# EAGLE board PCB (EAGLE 9.7.0)
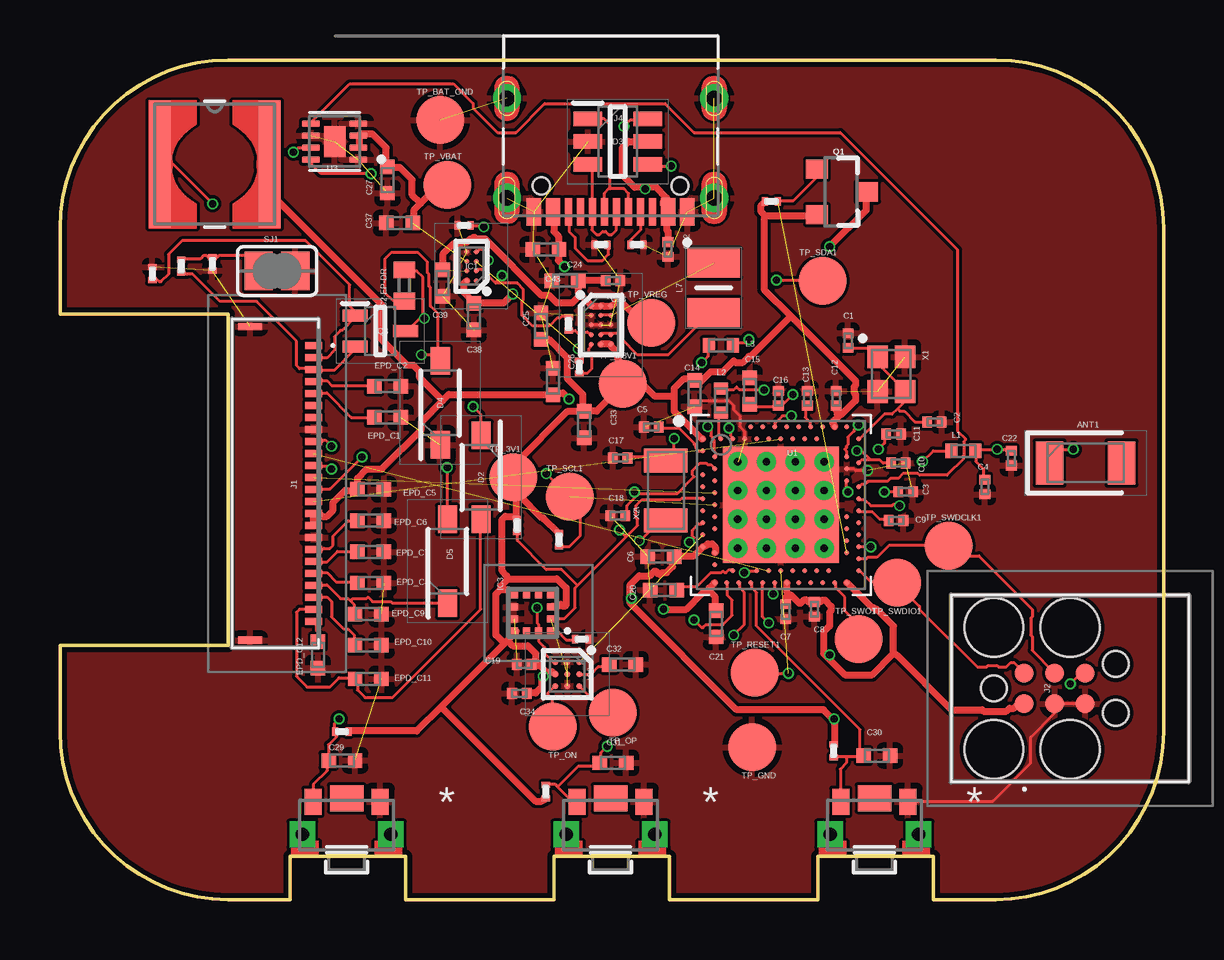
[diagram p0: board, top side]
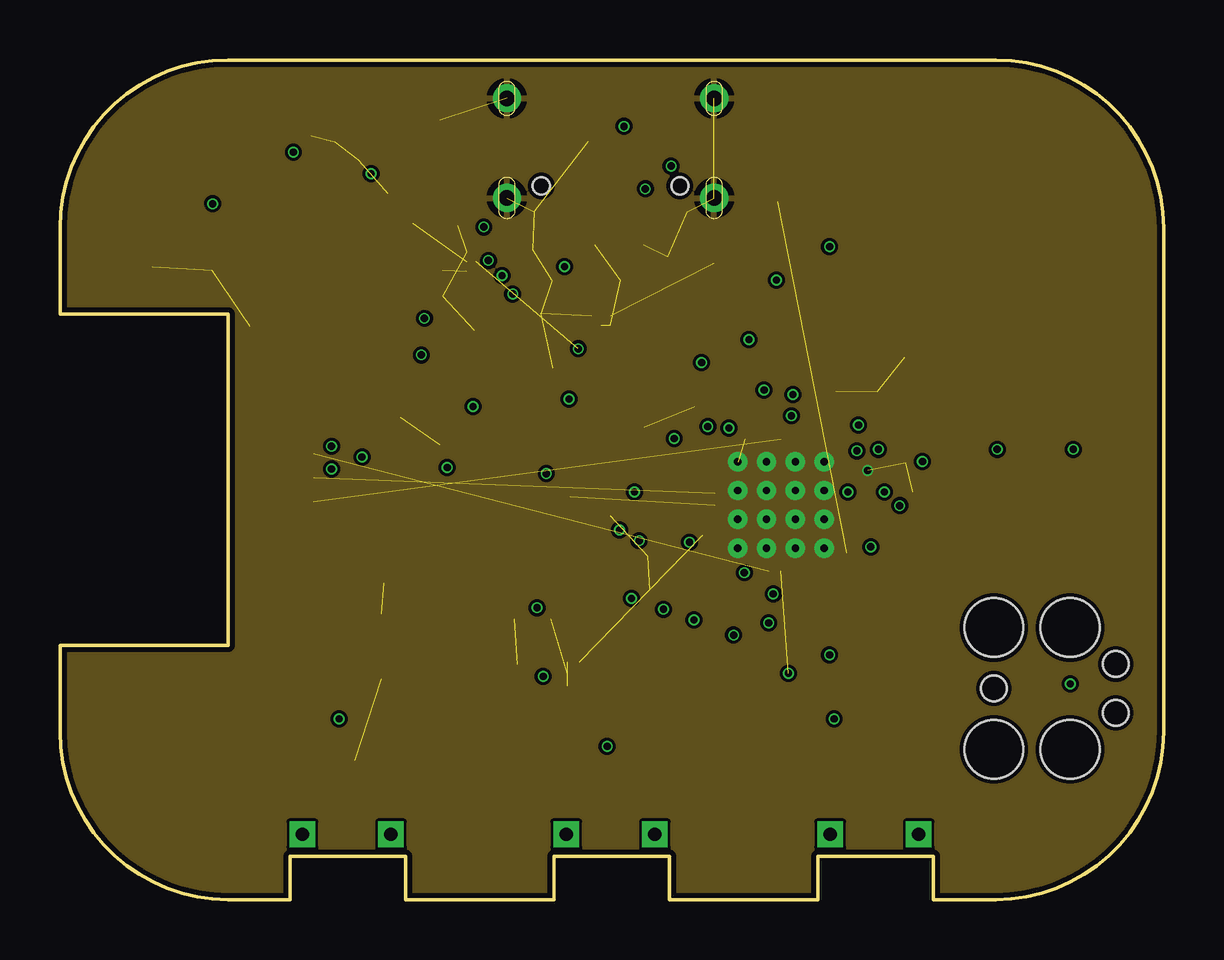
[diagram p1: board, inner layer Route2]
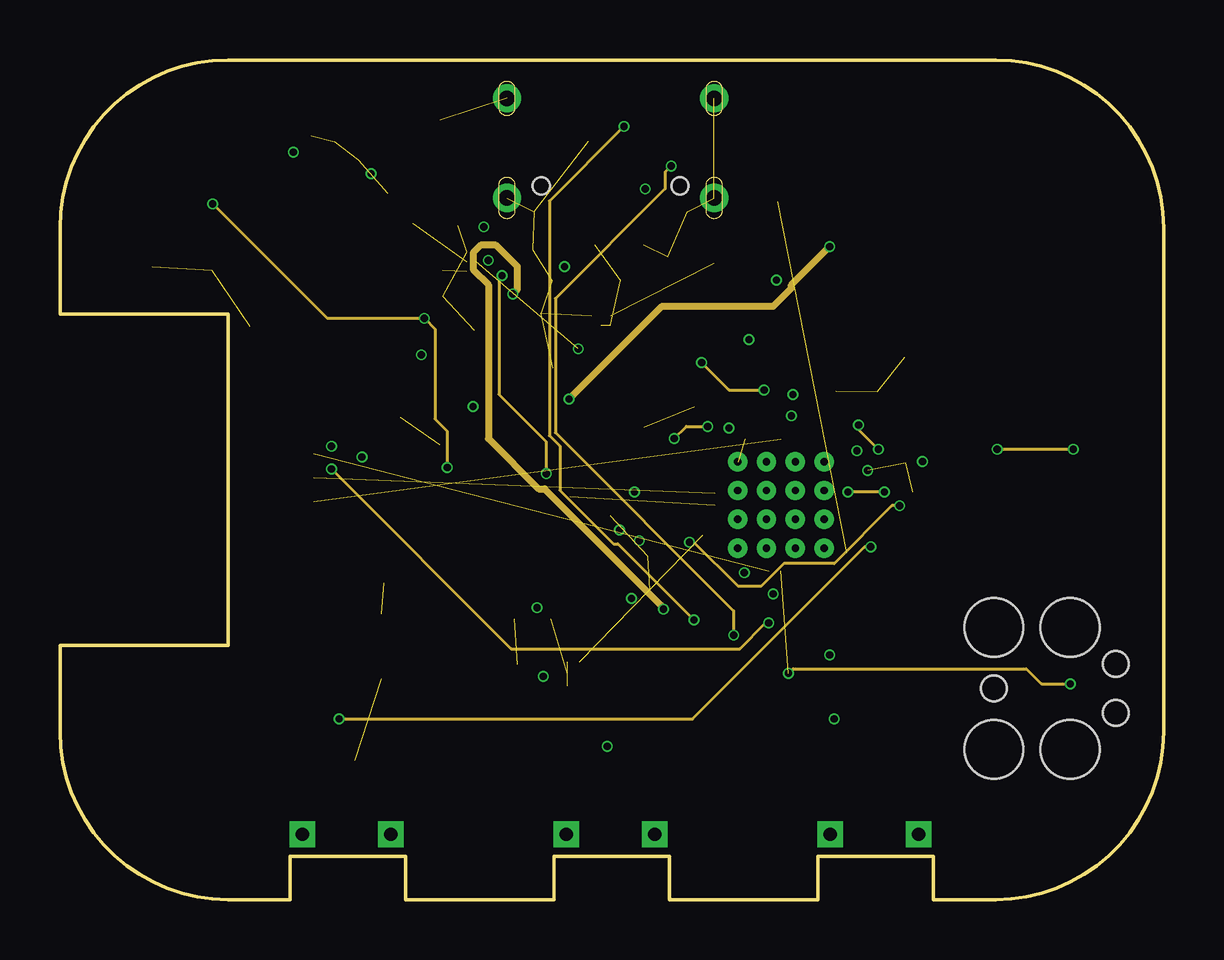
[diagram p2: board, inner layer Route15]
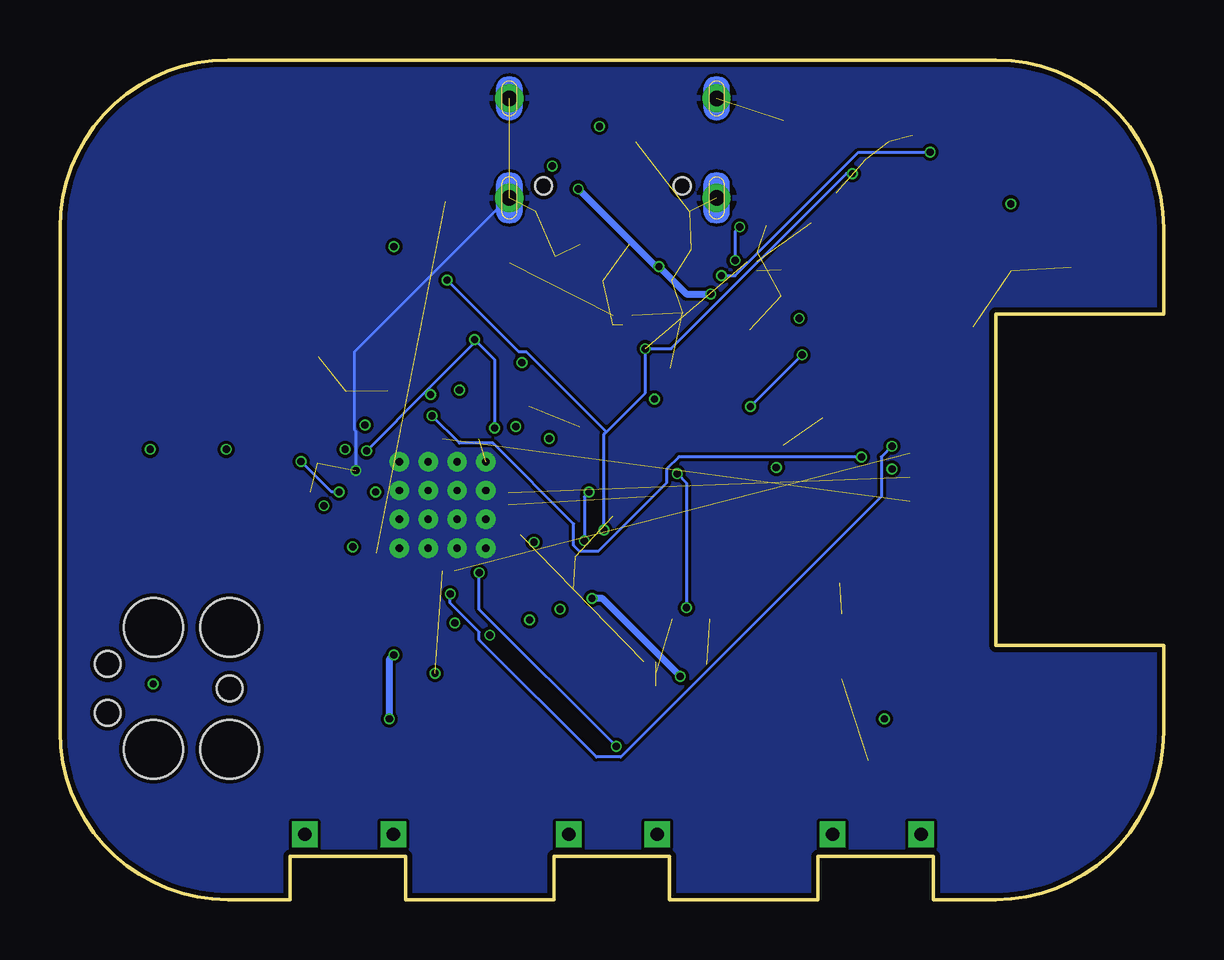
[diagram p3: board, bottom side, seen from below]

Size 46 x 35 mm. Coordinates in mm from the lower left corner, seen from the top.
Outline: 39,0 36.4,0 36.4,1.8 31.6,1.8 31.6,0 25.4,0 25.4,1.8 20.6,1.8 20.6,0 14.4,0 14.4,1.8 9.6,1.8 9.6,0 7,0 arc-90 0,7 0,10.6 7,10.6 7,24.4 0,24.4 0,28 arc-90 7,35 39,35 arc-90 46,28 46,7 arc-90 39,0
Copper layers (1*16): Top 0.035mm / dielectric 1.6mm / Bottom 0.035mm
Design rules "jlcpcb-2layers.dru": minimum track width 5mil, minimum drill 0.3mm, track to track 5mil, track to pad 5mil, pad to pad 5mil, via to via 5mil, smd to smd 5mil, copper to edge 0.2mm, drill to drill 6mil, minimum pad ring 10mil, minimum via ring 3mil, stop-mask expansion 4mil, vias tented up to drill 0mil, thermal gap 10mil

## Footprints (pad centres in the part's own frame; a part is rotated, then mirrored left to right if it is on the bottom)
2450AT18B100E_ANTC3216X140N = smd 1.15 x 1.8: 1 -1.5,0; 2 1.5,0
NORDIC_NRF_3_RESC0201_N = smd 0.4 x 0.45: 1 -0.305,0; 2 0.305,0
ESP32_C6_LIBRARY_1_ESP32_WROVER_EAGLE-LTSPICE_C0402 = smd 0.7 x 0.9: 1 -0.65,0; 2 0.65,0
NORDIC_NRF_3_RESC0402_N = smd 0.6 x 0.6: 1 -0.55,0; 2 0.55,0
ESP32_C6_LIBRARY_5_SOD3716X135N = smd 1.15 x 0.8: 1 -1.75,0; 2 1.75,0
ESP32_C6_LIBRARY_3_SOT95P280X145-6N = smd 1.2 x 0.6: 1 -1.25,0.95; 2 -1.25,0; 3 -1.25,-0.95; 4 1.25,-0.95; 5 1.25,0; 6 1.25,0.95
BQ25180YBGR_BGA8C40P2X4_100X155X50 = smd 0.2 x 0.2: A1 -0.2,0.6; A2 0.2,0.6; B1 -0.2,0.2; B2 0.2,0.2; C1 -0.2,-0.2; C2 0.2,-0.2; D1 -0.2,-0.6; D2 0.2,-0.6
DRV2605YZFR_BGA9C50P3X3_144X144X62 = smd 0.25 x 0.25: A1 -0.5,0.5; A2 0,0.5; A3 0.5,0.5; B1 -0.5,0; B2 0,0; B3 0.5,0; C1 -0.5,-0.5; C2 0,-0.5; C3 0.5,-0.5
BMA423_BMA423 = smd 0.3 x 0.35: 1 -0.75,-0.775; 2 -0.25,-0.775; 3 0.25,-0.775; 4 0.75,-0.775; 7 0.75,0.775; 8 0.25,0.775; 9 -0.25,0.775; 10 -0.75,0.775 | smd 0.35 x 0.3: 5 0.775,-0.25; 6 0.775,0.25; 11 -0.775,0.25; 12 -0.775,-0.25
RT6160AWSC_BGA15C40P3X5_140X230X60 = smd 0.216 x 0.216: A1 -0.4,0.8; A2 0,0.8; A3 0.4,0.8; B1 -0.4,0.4; B2 0,0.4; B3 0.4,0.4; C1 -0.4,0; C2 0,0; C3 0.4,0; D1 -0.4,-0.4; D2 0,-0.4; D3 0.4,-0.4; E1 -0.4,-0.8; E2 0,-0.8; E3 0.4,-0.8
503480-2400_5034802400 = smd 0.3 x 0.7: 1 -5.75,1.525; 2 -5.25,1.525; 3 -4.75,1.525; 4 -4.25,1.525; 5 -3.75,1.525; 6 -3.25,1.525; 7 -2.75,1.525; 8 -2.25,1.525; 9 -1.75,1.525; 10 -1.25,1.525; 11 -0.75,1.525; 12 -0.25,1.525; 13 0.25,1.525; 14 0.75,1.525; 15 1.25,1.525; 16 1.75,1.525; 17 2.25,1.525; 18 2.75,1.525; 19 3.25,1.525; 20 3.75,1.525; 21 4.25,1.525; 22 4.75,1.525; 23 5.25,1.525; 24 5.75,1.525 | smd 0.3 x 1: MP1 -6.54,-1.125; MP2 6.54,-1.125
TC2030-IDC_TC2030IDC = smd 0.783 x 0.783: 1 -0.953,-0.635; 2 -0.953,0.635; 3 0.317,-0.635; 4 0.317,0.635; 5 1.588,-0.635; 6 1.588,0.635 | hole 2.451: -2.223,-2.54; -2.223,2.54; 0.952,-2.54; 0.952,2.54 | hole 1.067: -2.223,0; 2.857,-1.016; 2.857,1.016
KH-TYPE-C-16P_KINGHELM_KH-TYPE-C-16P = smd 0.6 x 1.15: A1_B12 -3.2,4.725; A4_B9 -2.4,4.725; A9_B4 2.4,4.725; A12_B1 3.2,4.725 | smd 0.3 x 1.15: A5 -1.25,4.725; A6 -0.25,4.725; A7 0.25,4.725; A8 1.25,4.725; B5 1.75,4.725; B6 0.75,4.725; B7 -0.75,4.725; B8 -1.75,4.725 | drill 0.65 pad 1.05: SH1 -4.32,0; SH2 4.32,0; SH3 -4.32,4.15; SH4 4.32,4.15 | hole 0.7: -2.89,3.65; 2.89,3.65
NORDIC_NRF_2_RESC0402_L = smd 0.5 x 0.6: 1 -0.5,0; 2 0.5,0
ESP32_C6_LIBRARY_2_IND_4828-WE-TPC_WRE = smd 0.9 x 5.3: 1 -2.286,0; 2 2.286,0
MLP2016SR47MT0S1_INDC2016X100N = smd 1.2 x 2.2: 1 -1.028,0; 2 1.028,0
ESP32_C6_LIBRARY_4_ESP32_C6_LIBRARY_4_ESP32_C6_LIBRARY_4_ESP32_C6_LIBRARY_4_ESP32_WROVER_SPARKFUN-DISCRETESEMI_SOT23-3 = smd 0.8 x 0.9: 1 -0.95,-1; 2 0.95,-1; 3 0,1.1
ESP32_C6_LIBRARY_6_SOT65P210X110-3N = smd 1.05 x 0.5: 1 -1.05,0.65; 2 -1.05,-0.65; 3 1.05,0
CPF0201D7K68C1_0201 = smd 0.35 x 0.25: 1 0,0.275; 2 0,-0.275
ESP32_C6_LIBRARY_7_JUMPER_SJ = smd 1.168 x 1.6: 1 -0.762,0; 2 0.762,0
2025-10-22_07-23-44_LIBRARY_SW_EVP-AKE31A_PAN = smd 0.711 x 1.092: 1 -1.4,-0.972; 2 1.4,-0.972 | drill 0.559 pad 0.914 square: 3 -1.848,0.381; 4 1.848,0.381 | smd 1.397 x 1.092: 5 0,-1.124
HECTOR_WATCH_1_TP20R = smd 2 x 2: TP 0,0
NORDIC_NRF_4_AQFN50P700X700X85_HS-74N = smd 4.85 x 4.85: P$74 0,0 | drill 0.3 pad 0.6: P$75 -1.8,1.8; P$76 -0.6,1.8; P$77 0.6,1.8; P$78 1.8,1.8; P$79 -1.8,0.6; P$80 -0.6,0.6; P$81 0.6,0.6; P$82 1.8,0.6; P$83 -1.8,-0.6; P$84 -0.6,-0.6; P$85 0.6,-0.6; P$86 1.8,-0.6; P$87 -1.8,-1.8; P$88 -0.6,-1.8; P$89 0.6,-1.8; P$90 1.8,-1.8 | smd 0.2 x 0.2: P$A8 -1.25,3.25; P$A10 -0.75,3.25; P$A12 -0.25,3.25; P$A14 0.25,3.25; P$A16 0.75,3.25; P$A18 1.25,3.25; P$A20 1.75,3.25; P$A22 2.25,3.25; P$A23 2.75,3.25; P$AA24 3.25,-2.25; P$AB2 -2.75,-2.5; P$AC5 -2,-2.75; P$AC9 -1,-2.75; P$AC11 -0.5,-2.75; P$AC13 0,-2.75; P$AC15 0.5,-2.75; P$AC17 1,-2.75; P$AC19 1.5,-2.75; P$AC21 2,-2.75; P$AC24 3.25,-2.75; P$AD2 -2.75,-3.25; P$AD4 -2.25,-3.25; P$AD6 -1.75,-3.25; P$AD8 -1.25,-3.25; P$AD10 -0.75,-3.25; P$AD12 -0.25,-3.25; P$AD14 0.25,-3.25; P$AD16 0.75,-3.25; P$AD18 1.25,-3.25; P$AD20 1.75,-3.25; P$AD22 2.25,-3.25; P$AD23 2.75,-3.25; P$B1 -3.25,2.75; P$B3 -2.5,2.75; P$B5 -2,2.75; P$B7 -1.5,2.75; P$B9 -1,2.75; P$B11 -0.5,2.75; P$B13 0,2.75; P$B15 0.5,2.75; P$B17 1,2.75; P$B19 1.5,2.75; P$B24 3.25,2.75; P$C1 -3.25,2.25; P$D2 -2.75,2; P$D23 2.75,2; P$E24 3.25,1.75; P$F2 -2.75,1.5; P$F23 2.75,1.5; P$G1 -3.25,1.25; P$H2 -2.75,1; P$H23 2.75,1; P$J1 -3.25,0.75; P$J24 3.25,0.75; P$K2 -2.75,0.5; P$L1 -3.25,0.25; P$L24 3.25,0.25; P$M2 -2.75,0; P$N1 -3.25,-0.25; P$N24 3.25,-0.25; P$P2 -2.75,-0.5; P$P23 2.75,-0.5; P$R1 -3.25,-0.75; P$R24 3.25,-0.75; P$T2 -2.75,-1; P$T23 2.75,-1; P$U1 -3.25,-1.25; P$U24 3.25,-1.25; P$V23 2.75,-1.5; P$W1 -3.25,-1.75; P$W24 3.25,-1.75; P$Y2 -2.75,-2; P$Y23 2.75,-2
ESP32_C6_LIBRARY_SON50P200X200X80-9N = smd 0.76 x 0.27: 1 -0.985,0.75; 2 -0.985,0.25; 3 -0.985,-0.25; 4 -0.985,-0.75; 5 0.985,-0.75; 6 0.985,-0.25; 7 0.985,0.25; 8 0.985,0.75 | smd 0.9 x 1.3: 9 0,0
NORDIC_NRF_BT-XTAL_2016_N = smd 0.95 x 0.85: 1 -0.725,-0.575; 2 0.725,-0.575; 3 0.725,0.575; 4 -0.725,0.575
NORDIC_NRF_1_XTAL_3215_N = smd 1 x 1.8: 1 -1.25,0; 2 1.25,0

## Placement (x,y rotation side)
ANT1  2450AT18B100E  [2450AT18B100E_ANTC3216X140N]  42.75,18.2 0 top
C1  12pF  [NORDIC_NRF_3_RESC0201_N]  32.85,23.3 90 top
C2  12pF  [NORDIC_NRF_3_RESC0201_N]  36.45,19.9 0 top
C2-EP-DR  4.7uF/25V  [ESP32_C6_LIBRARY_1_ESP32_WROVER_EAGLE-LTSPICE_C0402]  14.35,25.6 90 top
C3  1pF  [NORDIC_NRF_3_RESC0201_N]  35.25,17 180 top
C4  1pF  [NORDIC_NRF_3_RESC0201_N]  38.55,17.2 90 top
C5  100nF  [NORDIC_NRF_3_RESC0201_N]  24.65,19.7 180 top
C6  1uF  [NORDIC_NRF_3_RESC0402_N]  25.05,14.3 180 top
C7  100nF  [NORDIC_NRF_3_RESC0201_N]  30.25,12 270 top
C8  100nF  [NORDIC_NRF_3_RESC0201_N]  31.45,12.1 270 top
C9  820pF  [NORDIC_NRF_3_RESC0201_N]  34.85,15.8 180 top
C10  N.C.  [NORDIC_NRF_3_RESC0201_N]  34.95,18.2 180 top
C11  100pF  [NORDIC_NRF_3_RESC0201_N]  34.75,19.4 180 top
C12  100nF  [NORDIC_NRF_3_RESC0201_N]  32.35,20.9 270 top
C13  N.C.  [NORDIC_NRF_3_RESC0201_N]  31.15,20.9 270 top
C14  4.7uF  [NORDIC_NRF_3_RESC0402_N]  26.45,21.1 270 top
C15  1uF  [NORDIC_NRF_3_RESC0402_N]  28.75,21.2 90 top
C16  47nF  [NORDIC_NRF_3_RESC0201_N]  29.95,20.9 270 top
C17  12pF  [NORDIC_NRF_3_RESC0201_N]  23.35,18.4 0 top
C18  12pF  [NORDIC_NRF_3_RESC0201_N]  23.25,16 0 top
C19  100nF  [NORDIC_NRF_3_RESC0201_N]  19.35,9.8 0 top
C20  1uF  [NORDIC_NRF_3_RESC0402_N]  25.15,12.9 180 top
C21  1uF  [NORDIC_NRF_3_RESC0402_N]  27.35,11.5 270 top
C22  N.C.  [NORDIC_NRF_3_RESC0201_N]  39.65,18.4 90 top
C23  0.1uF  [NORDIC_NRF_3_RESC0201_N]  23.05,25.8 180 top
C24  10uF  [NORDIC_NRF_3_RESC0402_N]  21.05,25.8 0 top
C25  22uF  [NORDIC_NRF_3_RESC0402_N]  20.05,23.9 90 top
C26  10uF  [NORDIC_NRF_3_RESC0402_N]  20.55,21.6 90 top
C27  0.1uF  [NORDIC_NRF_3_RESC0402_N]  13.65,30 90 top
C29  1uF  [NORDIC_NRF_3_RESC0402_N]  11.75,5.8 0 top
C30  1uF  [NORDIC_NRF_3_RESC0402_N]  34.05,6 180 top
C31  1uF  [NORDIC_NRF_3_RESC0402_N]  23.05,5.7 180 top
C32  1uF  [NORDIC_NRF_3_RESC0402_N]  23.45,9.8 180 top
C33  22uF  [NORDIC_NRF_3_RESC0402_N]  21.85,19.8 270 top
C34  0.1uF  [NORDIC_NRF_3_RESC0201_N]  19.15,8.6 180 top
C37  1uF  [NORDIC_NRF_3_RESC0402_N]  14.15,28.2 180 top
C38  1uF  [NORDIC_NRF_3_RESC0402_N]  17.25,24.3 270 top
C39  10uF  [NORDIC_NRF_3_RESC0402_N]  15.95,25.7 270 top
C42  0.1uF  [NORDIC_NRF_3_RESC0201_N]  25.35,27.1 270 top
C43  4.7uF  [NORDIC_NRF_3_RESC0402_N]  20.25,27.1 180 top
D2  MBR0530  [ESP32_C6_LIBRARY_5_SOD3716X135N]  17.55,17.6 270 top
D3  USBLC6-2SC6Y  [ESP32_C6_LIBRARY_3_SOT95P280X145-6N]  23.25,31.6 0 top
D4  MBR0530  [ESP32_C6_LIBRARY_5_SOD3716X135N]  15.85,20.7 90 top
D5  MBR0530  [ESP32_C6_LIBRARY_5_SOD3716X135N]  16.15,14.1 90 top
EPD_C1  1uF/50V  [NORDIC_NRF_3_RESC0402_N]  13.65,20.1 180 top
EPD_C2  1uF/50V  [NORDIC_NRF_3_RESC0402_N]  13.65,21.4 180 top
EPD_C5  0.1uF/50V  [NORDIC_NRF_3_RESC0402_N]  12.95,17.1 180 top
EPD_C6  1uF/50V  [NORDIC_NRF_3_RESC0402_N]  12.95,15.8 180 top
EPD_C7  1uF/50V  [NORDIC_NRF_3_RESC0402_N]  12.95,14.5 180 top
EPD_C8  1uF/50V  [NORDIC_NRF_3_RESC0402_N]  12.95,13.2 180 top
EPD_C9  1uF/50V  [NORDIC_NRF_3_RESC0402_N]  12.85,11.9 180 top
EPD_C10  1uF/50V  [NORDIC_NRF_3_RESC0402_N]  12.85,10.6 180 top
EPD_C11  1uF/50V  [NORDIC_NRF_3_RESC0402_N]  12.85,9.2 180 top
EPD_C12  1uF/50V  [NORDIC_NRF_3_RESC0402_N]  10.75,10.2 90 top
IC1  BQ25180YBGR  [BQ25180YBGR_BGA8C40P2X4_100X155X50]  17.15,26.4 180 top
IC2  DRV2605YZFR  [DRV2605YZFR_BGA9C50P3X3_144X144X62]  21.15,9.4 270 top
IC3  BMA423_BMA423  [BMA423_BMA423]  19.7,11.95 90 top
IC9  RT6160AWSC_RT6160AWSC  [RT6160AWSC_BGA15C40P3X5_140X230X60]  22.55,23.95 0 top
J1  503480-2400  [503480-2400_5034802400]  9.05,17.35 270 top
J2  TC2030-IDC_TC2030-IDC  [TC2030-IDC_TC2030IDC]  41.15,8.8 0 top
J4  KH-TYPE-C-16P  [KH-TYPE-C-16P_KINGHELM_KH-TYPE-C-16P]  22.95,33.4 180 top
L1  3.9nH  [NORDIC_NRF_2_RESC0402_L]  37.65,18.7 0 top
L2  10uH  [NORDIC_NRF_2_RESC0402_L]  27.55,20.8 90 top
L3  15nH  [NORDIC_NRF_2_RESC0402_L]  27.55,23.1 0 top
L5  68uH  [ESP32_C6_LIBRARY_2_IND_4828-WE-TPC_WRE]  6.45,30.65 0 top
L7  FTC252012SR47MBCA  [MLP2016SR47MT0S1_INDC2016X100N]  27.25,25.5 270 top
Q1  20V/4.2A/52mΩ/1.4W  [ESP32_C6_LIBRARY_4_ESP32_C6_LIBRARY_4_ESP32_C6_LIBRARY_4_ESP32_C6_LIBRARY_4_ESP32_WROVER_SPARKFUN-DISCRETESEMI_SOT23-3]  32.55,29.5 270 top
Q3  SI1308EDL-T1-GE3  [ESP32_C6_LIBRARY_6_SOT65P210X110-3N]  13.35,23.7 0 top
R1_EP_DR  0.47  [CPF0201D7K68C1_0201]  5.05,26.4 0 top
R1_USB  5K1  [CPF0201D7K68C1_0201]  24.05,27.3 270 top
R2  0  [CPF0201D7K68C1_0201]  21.65,22.2 0 top
R2_EP_DR  10k  [CPF0201D7K68C1_0201]  3.85,26.1 0 top
R2_USB  5K1  [CPF0201D7K68C1_0201]  22.55,27.3 270 top
R3  0  [CPF0201D7K68C1_0201]  21.75,10.85 270 top
R4  0  [CPF0201D7K68C1_0201]  21.2,24 0 top
R5  10K  [CPF0201D7K68C1_0201]  32.25,6.2 180 top
R7  10K  [CPF0201D7K68C1_0201]  11.75,7 90 top
R8  10K  [CPF0201D7K68C1_0201]  20.25,4.5 0 top
R9  10k  [CPF0201D7K68C1_0201]  16.85,28.1 90 top
R17  3K3  [CPF0201D7K68C1_0201]  20.8,15 0 top
R18  3K3  [CPF0201D7K68C1_0201]  19.05,15.6 0 top
R_PWR_EPD  10k  [CPF0201D7K68C1_0201]  29.65,29.1 270 top
R_TYPE_SEL  2.2  [CPF0201D7K68C1_0201]  6.35,26.5 180 top
SJ1  [ESP32_C6_LIBRARY_7_JUMPER_SJ]  9.05,26.2 180 top
SW_DN  2025-10-22_07-23-44_LIBRARY_EVP-AKE31ASW_EVP-AKE31A_PAN  [2025-10-22_07-23-44_LIBRARY_SW_EVP-AKE31A_PAN]  11.95,3.1 180 top
SW_ENT  2025-10-22_07-23-44_LIBRARY_EVP-AKE31ASW_EVP-AKE31A_PAN  [2025-10-22_07-23-44_LIBRARY_SW_EVP-AKE31A_PAN]  22.95,3.1 180 top
SW_UP  2025-10-22_07-23-44_LIBRARY_EVP-AKE31ASW_EVP-AKE31A_PAN  [2025-10-22_07-23-44_LIBRARY_SW_EVP-AKE31A_PAN]  33.95,3.1 180 top
TP_3.3V1  HECTOR_WATCH_1_TPTP20R  [HECTOR_WATCH_1_TP20R]  23.45,21.5 0 top
TP_3V1  HECTOR_WATCH_1_TPTP20R  [HECTOR_WATCH_1_TP20R]  18.9,17.6 0 top
TP_BAT_GND  HECTOR_WATCH_1_TPTP20R  [HECTOR_WATCH_1_TP20R]  15.85,32.5 0 top
TP_GND  HECTOR_WATCH_1_TPTP20R  [HECTOR_WATCH_1_TP20R]  28.85,6.35 180 top
TP_ON  HECTOR_WATCH_1_TPTP20R  [HECTOR_WATCH_1_TP20R]  20.55,7.2 180 top
TP_OP  HECTOR_WATCH_1_TPTP20R  [HECTOR_WATCH_1_TP20R]  23.05,7.8 180 top
TP_RESET1  HECTOR_WATCH_1_TPTP20R  [HECTOR_WATCH_1_TP20R]  28.95,9.45 0 top
TP_SCL1  HECTOR_WATCH_1_TPTP20R  [HECTOR_WATCH_1_TP20R]  21.25,16.8 0 top
TP_SDA1  HECTOR_WATCH_1_TPTP20R  [HECTOR_WATCH_1_TP20R]  31.8,25.8 0 top
TP_SWDCLK1  HECTOR_WATCH_1_TPTP20R  [HECTOR_WATCH_1_TP20R]  37.05,14.75 0 top
TP_SWDIO1  HECTOR_WATCH_1_TPTP20R  [HECTOR_WATCH_1_TP20R]  34.9,13.2 180 top
TP_SWO1  HECTOR_WATCH_1_TPTP20R  [HECTOR_WATCH_1_TP20R]  33.3,10.85 0 top
TP_VBAT  HECTOR_WATCH_1_TPTP20R  [HECTOR_WATCH_1_TP20R]  16.15,29.8 0 top
TP_VREG  HECTOR_WATCH_1_TPTP20R  [HECTOR_WATCH_1_TP20R]  24.65,24.05 0 top
U1  NRF52840_QF  [NORDIC_NRF_4_AQFN50P700X700X85_HS-74N]  30.05,16.45 0 top
U3  MAX17048G+T10  [ESP32_C6_LIBRARY_SON50P200X200X80-9N]  11.45,31.6 180 top
X1  32MHZ  [NORDIC_NRF_BT-XTAL_2016_N]  34.65,21.9 270 top
X2\  32.768kHz  [NORDIC_NRF_1_XTAL_3215_N]  25.25,17.05 270 top

## Library data of the parts
ANT1 = InkTime_v5; ARROW_PART_NUMBER: 2450AT18B100E; ARROW_PRICE-STOCK: https://www.arrow.com/en/products/2450at18b100e/johanson-dielectrics?utm_currency=USD&region=nac; DESCRIPTION: Antennas 2.45GHz ANTENNA; HEIGHT: 1.4mm; MANUFACTURER_NAME: JOHANSON TECHNOLOGY; MANUFACTURER_PART_NUMBER: 2450AT18B100E; MOUSER_PART_NUMBER: 609-2450AT18B100E; MOUSER_PRICE-STOCK: https://www.mouser.co.uk/ProductDetail/Johanson-Technology/2450AT18B100E?qs=yCnrNFeXz%252Bh5MFsFIXGZGA%3D%3D
C1-C27 C29-C34 C37-C39 C42 C43 EPD_C1 EPD_C2 EPD_C5-EPD_C12 L1-L3 R1_EP_DR R1_USB R2 R2_EP_DR R2_USB R3-R5 R7-R9 R17 R18 R_PWR_EPD R_TYPE_SEL SJ1 TP_3.3V1 TP_3V1 TP_BAT_GND TP_GND TP_ON TP_OP TP_RESET1 TP_SCL1 TP_SDA1 TP_SWDCLK1 TP_SWDIO1 TP_SWO1 TP_VBAT TP_VREG U1 X1 X2\ = InkTime_v5
C2-EP-DR = InkTime_v5; SPICEMODEL: NONE; SPICEPREFIX: C
D2 D4 D5 = InkTime_v5; AVAILABILITY: In Stock; CHECK_PRICES: https://www.snapeda.com/parts/MBR0530/Onsemi/view-part/?ref=eda; DESCRIPTION: Diode Schottky 30 V 500mA Surface Mount SOD-123; MF: ON Semiconductor; MP: MBR0530; PACKAGE: SOD-123-2 ON Semiconductor; PRICE: None; PURCHASE-URL: https://www.snapeda.com/api/url_track_click_mouser/?unipart_id=179458&manufacturer=ON Semiconductor&part_name=MBR0530&search_term=None; SNAPEDA_LINK: https://www.snapeda.com/parts/MBR0530/Onsemi/view-part/?ref=snap
D3 = InkTime_v5; AVAILABILITY: In Stock; CHECK_PRICES: https://www.snapeda.com/parts/USBLC6-2SC6Y/STMicroelectronics/view-part/?ref=eda; DESCRIPTION: 17V Clamp 5A (8/20µs) Ipp Tvs Diode Surface Mount SOT-23-6; MF: STMicroelectronics; MP: USBLC6-2SC6Y; PACKAGE: SOT-23-6 STMicroelectronics; PRICE: None; SNAPEDA_LINK: https://www.snapeda.com/parts/USBLC6-2SC6Y/STMicroelectronics/view-part/?ref=snap
IC1 = InkTime_v5; ARROW_PART_NUMBER: BQ25180YBGR; ARROW_PRICE-STOCK: https://www.arrow.com/en/products/bq25180ybgr/texas-instruments?utm_currency=USD&region=nac; DESCRIPTION: Charger IC Lithium Ion/Polymer, Lithium Iron Phosphate 8-DSBGA (1.6x1.1); HEIGHT: 0.5mm; MANUFACTURER_NAME: Texas Instruments; MANUFACTURER_PART_NUMBER: BQ25180YBGR; MOUSER_PART_NUMBER: 595-BQ25180YBGR; MOUSER_PRICE-STOCK: https://www.mouser.co.uk/ProductDetail/Texas-Instruments/BQ25180YBGR?qs=doiCPypUmgEWjAK%252BJAX6Tw%3D%3D
IC2 = InkTime_v5; ARROW_PART_NUMBER: DRV2605YZFR; ARROW_PRICE-STOCK: https://www.arrow.com/en/products/drv2605yzfr/texas-instruments?region=nac; DESCRIPTION: Haptic Driver for ERM/LRA with Built-In Library and Smart Loop Architecture; HEIGHT: 0.625mm; MANUFACTURER_NAME: Texas Instruments; MANUFACTURER_PART_NUMBER: DRV2605YZFR
IC3 = InkTime_v5; ARROW_PART_NUMBER: BMA423; ARROW_PRICE-STOCK: https://www.arrow.com/en/products/bma423/bosch; DESCRIPTION: Accelerometers Triaxial low-g 12bit Acceleration Sensor; HEIGHT: 1mm; MANUFACTURER_NAME: BOSCH; MANUFACTURER_PART_NUMBER: BMA423; MOUSER_PART_NUMBER: 262-BMA423; MOUSER_PRICE-STOCK: https://www.mouser.co.uk/ProductDetail/Bosch-Sensortec/BMA423?qs=HXFqYaX1Q2xC%252BSgeGoX3mg%3D%3D
IC9 = InkTime_v5; DESCRIPTION: Buck-Boost Regulator Positive Output Step-Up/Step-Down I2C DC-DC Controller IC 15-WL-CSP (BSC) (1.4x2.3); HEIGHT: 0.6mm; MANUFACTURER_NAME: RICHTEK; MANUFACTURER_PART_NUMBER: RT6160AWSC; MOUSER_PART_NUMBER: 835-RT6160AWSC; MOUSER_PRICE-STOCK: https://www.mouser.co.uk/ProductDetail/Richtek/RT6160AWSC?qs=amGC7iS6iy%2FLd9PSoixZXQ%3D%3D
J1 = InkTime_v5; DESCRIPTION: FFC & FPC Connectors 0.5mm FPC RA SMT Dual Contact 24Ckt; HEIGHT: 1.87mm; MANUFACTURER_NAME: Molex; MANUFACTURER_PART_NUMBER: 503480-2400; MOUSER_PART_NUMBER: 538-503480-2400; MOUSER_PRICE-STOCK: https://www.mouser.co.uk/ProductDetail/Molex/503480-2400?qs=OAhjpuo3Vu7efIoxFh9AOw%3D%3D
J2 = InkTime_v5; DESCRIPTION: CABLE ADAPTER 6 POS; HEIGHT: 19mm; MANUFACTURER_NAME: Tag Connect; MANUFACTURER_PART_NUMBER: TC2030-IDC
J4 = InkTime_v5; AVAILABILITY: Not in stock; CHECK_PRICES: https://www.snapeda.com/parts/KH-TYPE-C-16P/Kinghelm/view-part/?ref=eda; MF: kinghelm; MP: KH-TYPE-C-16P; PACKAGE: None; PRICE: None; SNAPEDA_LINK: https://www.snapeda.com/parts/KH-TYPE-C-16P/Kinghelm/view-part/?ref=snap
L5 = InkTime_v5; COPYRIGHT: Copyright (C) 2024 Ultra Librarian. All rights reserved.; MANUFACTURER_PART_NUMBER: 744043680; MFR_NAME: Wurth Electronics
L7 = InkTime_v5; DESCRIPTION: SMD / SMT Inductors (Coils), L=0.47?H, L x W x T :; HEIGHT: 1mm; JLCPCB: https://jlcpcb.com/partdetail/6763488-FTC252012SR47MBCA/C5832368; MANUFACTURER_NAME: TDK; MANUFACTURER_PART_NUMBER: FTC252012SR47MBCA
Q1 = InkTime_v5; PROD_ID: TRAN-14388
Q3 = InkTime_v5; AVAILABILITY: In Stock; CHECK_PRICES: https://www.snapeda.com/parts/SI1308EDL-T1-GE3/Vishay+Siliconix/view-part/?ref=eda; DESCRIPTION: Si1308EDL-T1-GE3 N-channel MOSFET Transistor, 1.5 A, 30 V, 3-Pin SC-70 | Siliconix / Vishay SI1308EDL-T1-GE3; MF: Vishay Siliconix; MP: SI1308EDL-T1-GE3; PACKAGE: SOT-323 Vishay Semiconductor; PRICE: None; PURCHASE-URL: https://www.snapeda.com/api/url_track_click_mouser/?unipart_id=274603&manufacturer=Vishay Siliconix&part_name=SI1308EDL-T1-GE3&search_term=None; SNAPEDA_LINK: https://www.snapeda.com/parts/SI1308EDL-T1-GE3/Vishay+Siliconix/view-part/?ref=snap
SW_DN SW_ENT SW_UP = InkTime_v5; COPYRIGHT: Copyright (C) 2025 Ultra Librarian. All rights reserved.; DIGI-KEY_PART_NUMBER_1: P123437TR-ND; DIGI-KEY_PART_NUMBER_2: P123437CT-ND; DIGI-KEY_PART_NUMBER_3: P123437DKR-ND; MANUFACTURER_NAME: Panasonic; MANUFACTURER_PART_NUMBER: EVP-AKE31A
U3 = InkTime_v5; AVAILABILITY: In Stock; CHECK_PRICES: https://www.snapeda.com/parts/MAX17048G+T10/Analog+Devices/view-part/?ref=eda; DESCRIPTION: 3µA 1-Cell/2-Cell Fuel Gauge with ModelGauge; MF: Analog Devices; MP: MAX17048G+T10; PACKAGE: TDFN-8 Maxim; PRICE: None; PURCHASE-URL: https://www.snapeda.com/api/url_track_click_mouser/?unipart_id=329239&manufacturer=Analog Devices&part_name=MAX17048G+T10&search_term=None; SNAPEDA_LINK: https://www.snapeda.com/parts/MAX17048G+T10/Analog+Devices/view-part/?ref=snap

## Nets
3V3 [TRASEEPUTERE]: C6.1 C7.1 C8.1 C12.2 C14.1 C19.2 C25.1 C33.1 C34.1 IC2.C2 IC3.3 IC3.7 IC3.10 IC9.E2 IC9.E3 J2.1 Q1.2 R5.2 R7.2 R8.2 R17.1 R18.1 R_PWR_EPD.2 TP_3.3V1.TP TP_3V1.TP U1.P$A22 U1.P$AD14 U1.P$AD23 U1.P$B1 U1.P$W1 U1.P$Y2
ALERT: U1.P$J24 U3.5
D+: D3.4 U1.P$AD6
D-: D3.6 U1.P$AD4
DN: D3.1 J4.A7 J4.B7
DP: D3.3 J4.A6 J4.B6
EPD_3V3 [TRASEEPUTERE]: C26.1 EPD_C5.2 J1.15 J1.16 L5.2 Q1.3
EPD_BUSY: J1.9 U1.P$AD12
EPD_CS: J1.12 U1.P$K2
EPD_DC: J1.11 U1.P$AD10
EPD_RST: J1.10 U1.P$AC11
GDR: J1.2 Q3.1 R2_EP_DR.2
GND: C1.2 C2.2 C3.1 C4.1 C5.2 C6.2 C7.2 C8.2 C9.1 C10.1 C11.1 C12.1 C13.1 C14.2 C15.2 C16.1 C17.1 C18.1 C19.1 C20.2 C21.2 C22.1 C23.1 C24.1 C25.2 C26.2 C27.1 C29.2 C30.1 C31.1 C32.1 C33.2 C34.2 C37.2 C38.2 C39.2 C42.2 C43.2 D3.2 D4.1 EPD_C1.1 EPD_C2.1 EPD_C5.1 EPD_C6.1 EPD_C7.1 EPD_C8.1 EPD_C9.1 EPD_C10.1 EPD_C11.1 EPD_C12.1 IC1.D2 IC2.B1 IC2.B3 IC3.8 IC3.9 IC9.B1 IC9.C1 IC9.C2 IC9.C3 J1.8 J1.17 J1.MP1 J1.MP2 J2.3 J2.5 J4.A1_B12 J4.A12_B1 J4.SH1 J4.SH2 J4.SH3 J4.SH4 R1_USB.1 R2_EP_DR.1 R2_USB.2 R3.1 R9.1 R_TYPE_SEL.1 SJ1.1 SW_DN.1 SW_ENT.1 SW_UP.1 TP_BAT_GND.TP TP_GND.TP U1.P$74 U1.P$75 U1.P$76 U1.P$77 U1.P$78 U1.P$79 U1.P$80 U1.P$81 U1.P$82 U1.P$83 U1.P$84 U1.P$85 U1.P$86 U1.P$87 U1.P$88 U1.P$89 U1.P$90 U1.P$B7 U1.P$F23 U3.1 U3.4 U3.6 U3.9 X1.2 X1.4
HAPTIC_EN: IC2.A1 U1.P$U1
IMU_INT1: U1.P$N1
IMU_INT2: U1.P$P2
LX1: IC9.B2 IC9.B3 L7.1
LX2: IC9.D2 IC9.D3 L7.2
MOSI: J1.14 U1.P$B13
MU_INT1: IC3.5
MU_INT2: IC3.6
N$1: J4.A5 R1_USB.2
N$2: J4.B5 R2_USB.1
N$3: C3.2 L1.1 U1.P$H23
N$4: ANT1.1 C4.2 C22.2 L1.2
N$6: C2-EP-DR.2 D5.2 L5.1 Q3.3
N$8: C11.2 U1.P$D23
N$10: C1.1 C2.1 U1.P$B24 X1.1 X1.3
N$12: EPD_C6.2 J1.18
N$13: EPD_C7.2 J1.19
N$14: EPD_C8.2 J1.20
N$15: C2-EP-DR.1 D2.1 D4.2
N$17: C9.2 U1.P$N24
N$18: EPD_C2.2 J1.4
N$19: L2.1 U1.P$B3
N$20: EPD_C1.2 J1.5
N$22: R1_EP_DR.1 R_TYPE_SEL.2 SJ1.2
N$23: EPD_C10.2 J1.22
N$25: EPD_C12.2 J1.24
N$28: IC1.D1 R9.2
N$29: IC9.D1 R4.2
N$30: IC9.E1 R2.2
N$31: IC3.1 R3.2
N$32: C5.1 U1.P$C1
N$33: C17.2 U1.P$D2 X2\.1
N$34: C20.1 U1.P$AC5
N$35: C18.2 U1.P$F2 X2\.2
N$39: C32.2 IC2.A2
N$40: L2.2 L3.1
N$41: C10.2 C15.1 C16.2 L3.2 U1.P$B5 U1.P$E24
N$52: C13.2 U1.P$A18
OUT+: IC2.A3 TP_OP.TP
OUT-: IC2.C3 TP_ON.TP
P0.04: U1.P$J1
P0.13: C30.2 R5.1 SW_UP.2 U1.P$AD8
P0.14: C31.2 R8.1 SW_ENT.2 U1.P$AC9
P0.19: U1.P$AC15
P0.20: U1.P$AD16
P0.21: U1.P$AC17
P0.22: U1.P$AD18
P0.23: U1.P$AC19
P0.24: U1.P$AD20
P0.25: U1.P$AC21
P0.26: U1.P$G1
P0.27: U1.P$H2
P0.28: U1.P$B11
P0.29: U1.P$A10
P0.30: U1.P$B9
P0.31: U1.P$A8
P1.01: Q1.1 R_PWR_EPD.1 U1.P$Y23
P1.02: C29.1 R7.1 SW_DN.2 U1.P$W24
P1.03: U1.P$V23
P1.04: U1.P$U24
P1.05: U1.P$T23
P1.06: U1.P$R24
P1.07: U1.P$P23
P1.09: U1.P$L24 U1.P$R1
P1.10: U1.P$A20
P1.11: U1.P$B19
P1.12: U1.P$B17
P1.13: U1.P$A16
P1.14: U1.P$B15
P1.15: U1.P$A14
PMIC_IN: IC1.A1
PMIC_INT: U1.P$T2
PREVGH: D5.1 EPD_C9.2 J1.21
PREVGL: D2.2 EPD_C11.2 J1.23
RESE: J1.3 Q3.2 R1_EP_DR.2
RESET: J2.6 TP_RESET1.TP U1.P$AC13
SCK: J1.13 U1.P$A12
SCL: IC1.B1 IC2.C1 IC3.12 R4.1 R17.2 TP_SCL1.TP U1.P$M2 U3.7
SDA: IC1.C1 IC2.B2 IC3.2 R2.1 R18.2 TP_SDA1.TP U1.P$L1 U3.8
SWDCLK: J2.4 TP_SWDCLK1.TP U1.P$AA24
SWDIO: J2.2 TP_SWDIO1.TP U1.P$AC24
SWO: TP_SWO1.TP U1.P$AD22
VBAT [TRASEEPUTERE]: C27.2 C37.1 IC1.C2 TP_VBAT.TP U3.2 U3.3
VBUS [TRASEEPUTERE]: C21.1 C38.1 C42.1 C43.1 D3.5 IC1.A2 J4.A4_B9 J4.A9_B4 U1.P$AD2
VREG [TRASEEPUTERE]: C23.2 C24.2 C39.1 IC1.B2 IC9.A1 IC9.A2 IC9.A3 TP_VREG.TP

## Tracks (layer width: path | path; a pad name or v marks a point on that pad's centre or on a via)
3V3  (via drill 0.3)
  Top 0.3: U1.P$Y2 27.32,14.45 27.32,14.71 27.19,14.83 27,14.83 26.94,14.77 U1.P$W1 26.75,14.64 26.43,14.32 25.6,14.32 C6.1 25.54,14.2 25.54,13.88 25.29,13.62 25.1,13.62 25.03,13.56 24.97,13.56 24.84,13.69 24.78,13.69 24.59,13.5 24.14,13.5 23.76,13.12 23.76,12.55 | 30.37,12.74 30.3,12.8 30.3,13.18 U1.P$AD14 | 30.37,12.74 30.3,12.67 30.3,12.55 30.24,12.48 30.24,12.36 C7.1 | 34.75,10.26 34.75,11.4 34.05,12.1 33.99,12.1 33.92,12.16 33.86,12.16 32.84,13.18 U1.P$AD23 | 34.75,10.26 33.86,9.37 32.72,9.37 31.99,10.1 | 31.99,10.1 31.83,10.26 31.83,11.15 32.08,11.4 32.08,11.97 32.14,12.04 32.14,12.23 31.89,12.48 31.76,12.48 31.7,12.42 31.51,12.42 C8.1 31.32,12.42 31.19,12.42 31.13,12.48 31,12.48 30.87,12.36 30.81,12.36 30.49,12.67 30.37,12.74 | R5.2 32.27,6.51 v32.27,7.53 32.14,7.59 31.83,7.91 28.21,7.91 23.76,12.36 23.76,12.55 | v32.08,10.2 31.99,10.1 | J2.1 40.15,8.16 39.96,8.16 39.77,7.97 39.57,7.97 39.45,7.85 38.49,7.85 38.43,7.91 37.16,7.91 34.88,10.2 34.75,10.26 | 32.46,20.17 32.21,19.91 32.21,19.85 32.27,19.79 32.27,19.72 U1.P$A22 | 32.46,20.17 32.4,20.23 32.4,20.36 32.34,20.42 32.34,20.55 C12.2 | 29.41,28.48 29.22,28.68 29.22,28.93 29.35,29.06 R_PWR_EPD.2 | 29.41,28.48 31.45,28.48 31.51,28.55 Q1.2 | 30.46,24.33 29.35,25.44 29.35,28.36 29.41,28.48 | 30.46,24.33 33.16,21.63 33.16,21.44 33.1,21.37 33.1,21.12 33.16,21.05 33.16,20.8 32.59,20.23 32.46,20.17 | 25.6,20.99 25.6,21.31 25.98,21.69 26.43,21.69 C14.1 26.43,21.5 26.62,21.5 27.13,22.01 27.64,22.01 28.08,22.45 28.14,22.39 28.46,22.39 28.71,22.64 28.78,22.64 30.46,24.33 | 25.6,20.99 25.6,20.36 26.75,19.21 U1.P$B1
  Top 0.3: 22.94,23.15 IC9.E2 | 22.94,23.15 IC9.E3 | 22.94,23.15 23,23.02 23.25,22.77 23.25,22.52 23.45,22.33 23.45,21.56 TP_3.3V1.TP | C33.1 22.37,20.36 23.38,21.37 TP_3.3V1.TP | C25.1 20.08,23.34 20.4,23.34 21.16,22.58 21.16,21.69 21.79,21.05 21.79,20.55 21.73,20.48 21.73,20.42 C33.1 | 25.6,20.99 24.78,20.99 24.33,21.44 23.57,21.44 TP_3.3V1.TP | 19,15.97 19,17.5 18.94,17.56 TP_3V1.TP | 19,15.97 19,15.91 R18.1 | R17.1 20.78,15.28 20.14,15.91 20.08,15.91 19.13,16.86 TP_3V1.TP | 20.27,9.5 20.52,9.5 20.59,9.44 IC2.C2 | 20.27,9.5 20.02,9.75 19.89,9.75 19.82,9.82 19.7,9.82 C19.2 19.82,9.94 19.82,10.26 19.51,10.58 18.87,10.58 18.65,10.8 | 20.08,9.18 20.08,8.86 19.82,8.61 19.51,8.61 C34.1 | 20.08,9.18 20.27,9.37 20.27,9.5 | 18.65,10.8 19,11.15 19,11.21 18.94,11.21 IC3.10 | 18.65,10.8 18.52,10.67 | 18.52,10.67 15.89,8.04 | 15.89,8.04 14.87,7.02 12.08,7.02 R7.2 | 18.36,12.93 18.68,12.93 18.87,12.74 IC3.7 | 18.36,12.93 18.17,12.74 18.17,11.02 18.52,10.67 | 15.89,8.04 19.82,4.1 20.08,4.1 20.14,4.16 20.21,4.16 R8.2 | 18.68,13.37 20.71,13.37 21.09,12.99 21.09,12.29 21.03,12.23 20.97,12.23 20.9,12.29 20.84,12.29 20.78,12.23 20.52,12.23 IC3.3 | 18.68,13.37 18.36,13.05 18.36,12.93 | 19,15.97 18.55,15.97 18.43,15.85 18.43,13.69 18.62,13.5 18.68,13.37 | C33.1 21.6,20.36 21.16,20.36 19,18.2 19,17.69 TP_3V1.TP | v23.83,12.55 23.76,12.55 | v20.14,9.31 20.08,9.18
  Bottom 0.3: v32.27,7.53 32.27,10.01 v32.08,10.2 | v23.83,12.55 23.38,12.55 v20.14,9.31
ALERT
  Top 0.127: U1.P$J24 33.35,17.25 33.42,17.31 33.54,17.31 33.67,17.44 34.49,17.44 34.62,17.56 34.94,17.56 35.13,17.75 35.76,17.75 35.83,17.69 36.97,17.69 37.67,18.39 37.61,18.45 37.67,18.52 37.67,19.09 37.73,19.15 37.73,19.21 37.42,19.53 37.42,27.09 32.53,31.98 26.43,31.98 25.22,33.18 20.21,33.18 19,31.98 18.24,31.98 17.22,32.99 17.22,33.18 16.4,34.01 12.08,34.01 10.43,32.36 U3.5
D+  (via drill 0.3)
  Top 0.127: v28.08,11.02 28.52,11.47 28.52,12.8 28.33,12.99 28.33,13.18 U1.P$AD6 | v25.48,30.58 24.59,30.58 24.52,30.64 D3.4
  Route15 0.127: v28.08,11.02 28.08,12.04 20.65,19.47 20.65,25.06 25.22,29.63 25.22,30.33 v25.48,30.58
D-  (via drill 0.3)
  Top 0.127: v26.43,11.66 26.75,11.34 26.81,11.34 26.94,11.47 27.64,11.47 28.02,11.85 28.02,12.48 27.83,12.67 27.83,13.18 U1.P$AD4 | v23.51,32.23 23.76,32.48 24.4,32.48 24.46,32.55 D3.6
  Route15 0.127: v26.43,11.66 23.25,14.83 23.06,14.83 20.84,17.05 20.84,18.9 20.4,19.34 20.4,29.12 v23.51,32.23
DN
  Top 0.127: 22.94,29.63 23.51,29.63 23.7,29.44 J4.B7 | 22.94,29.63 22.87,29.63 22.68,29.44 22.68,28.68 J4.A7 | 22.94,29.63 22.94,32.29 22.68,32.55 22.05,32.55 D3.1
DP
  Top 0.127: 22.18,28.68 22.18,30.52 22.05,30.64 D3.3 | 22.18,28.68 22.18,27.91 22.37,27.72 22.49,27.72 22.62,27.85 22.75,27.85 22.87,27.72 23,27.72 23.19,27.91 J4.A6 | 22.18,28.68 J4.B6
EPD_3V3  (via drill 0.3)
  Top 0.3: 15.95,20.8 15.06,19.91 15.06,19.59 13.41,17.94 12.78,17.94 12.4,17.56 12.4,17.31 12.27,17.18 EPD_C5.2 12.4,17.05 11.89,17.05 11.38,16.55 11.38,16.23 11.13,15.97 10.94,15.97 10.81,16.1 10.62,16.1 J1.15 10.55,15.97 10.55,15.66 J1.16 | 15.95,20.8 16.21,21.05 20.52,21.05 C26.1 20.59,21.18 20.65,21.18 20.71,21.12 20.97,21.12 v21.22,20.87 | v32.08,27.21 33.61,28.74 33.61,29.44 Q1.3 | 15.95,20.8 15,21.75 15,22.01 14.75,22.26 14.49,22.26 13.41,23.34 13.41,24.8 8.78,29.44 8.78,30.64 L5.2
  Route15 0.3: v32.08,27.21 30.49,25.63 30.49,25.5 29.73,24.74 25.1,24.74 v21.22,20.87
EPD_BUSY  (via drill 0.3)
  Top 0.127: v29.73,12.74 29.79,12.8 29.79,13.18 U1.P$AD12 | v11.32,18.9 11.06,19.15 11,19.15 10.87,19.02 10.68,19.02 10.62,19.09 J1.9
  Bottom 0.127: v29.73,12.74 29.73,12.36 28.52,11.15 28.52,10.83 23.64,5.94 22.62,5.94 11.76,16.8 11.76,18.45 v11.32,18.9
EPD_CS  (1 unrouted)
EPD_DC  (via drill 0.3)
  Top 0.127: v29.54,11.53 29.29,11.78 29.29,13.18 U1.P$AD10 | v11.32,17.94 11.19,18.07 10.62,18.07 J1.11
  Route15 0.127: v29.54,11.53 29.41,11.53 28.33,10.45 18.81,10.45 v11.32,17.94
EPD_RST  (1 unrouted)
GDR
  Top 0.127: R2_EP_DR.2 3.89,25.82 4.08,25.82 4.14,25.75 4.21,25.75 4.52,26.07 4.52,26.9 5.09,27.47 10.24,27.47 12.08,25.63 12.08,24.74 12.33,24.48 12.33,24.36 Q3.1 12.33,24.29 11.76,23.72 11.7,23.72 11.44,23.47 11.44,22.9 11.13,22.58 10.62,22.58 J1.2
GND  (via drill 0.3)  (36 unrouted)
  Top 0.127: J2.5 42.69,8.16 J2.3 41.48,8.1 41.48,7.78 40.46,6.77 40.46,5.69 38.88,4.1 35.38,4.1 SW_UP.1 | U1.P$B7 28.52,19.21 28.52,19.53 28.33,19.72 28.33,20.17 28.08,20.42 28.08,20.61 27.89,20.8 26.68,20.8 26.49,20.61 C14.2 | v33.67,17.88 33.16,17.88 33.1,17.94 32.84,17.94 U1.P$F23 | IC9.C2 22.49,23.98 22.18,23.98 IC9.C1 | 28.27,15.85 28.27,14.71 U1.P$87 28.33,14.71 29.41,14.71 U1.P$88 | 28.27,15.85 U1.P$83 28.27,15.91 28.27,16.99 U1.P$79 | 28.27,15.85 U1.P$74 | U1.P$84 29.48,15.91 29.48,16.23 U1.P$74 | U1.P$80 29.48,16.99 29.48,16.29 U1.P$74 | 30.68,15.85 30.68,14.71 U1.P$89 30.75,14.71 31.83,14.71 U1.P$90 | U1.P$75 28.27,18.26 29.41,18.26 U1.P$74 | 30.68,15.85 U1.P$85 30.75,15.85 31.83,15.85 U1.P$86 31.89,15.91 31.89,16.99 U1.P$82 | 30.68,15.85 U1.P$74 | U1.P$81 30.62,16.99 29.92,16.99 U1.P$74 | U1.P$74 29.48,18.26 U1.P$76 29.54,18.26 30.62,18.26 U1.P$77 30.68,18.26 31.83,18.26 U1.P$78
  Bottom 0.127: v33.67,17.88 33.67,19.53 33.73,19.59 33.73,22.83 27.32,29.25 J4.SH3
  pour Top: 0.08,0.18 44.77,0.18 46.12,1.53 46.12,34.47 45.67,34.92 0.08,34.92
  pour Route2: -0.07,0.08 46.06,0.08 46.06,36.02 -0.07,34.79
  pour Bottom: -0.17,0.18 -0.19,0.16 -0.57,-0.22 45.22,-0.22 46.07,0.63 46.07,35.17 45.82,35.42 45.73,35.42 45.71,35.44 45.69,35.46 45.67,35.48 45.67,35.52 45.69,35.54 45.76,35.62 -0.17,35.02
HAPTIC_EN  (1 unrouted)
LX1  (1 unrouted)
  Top 0.127: IC9.B2 22.94,24.36 IC9.B3
LX2
  Top 0.127: IC9.D2 22.56,23.6 22.94,23.6 IC9.D3 23,23.6 23.32,23.6 23.45,23.47 23.45,23.34 24.08,22.71 25.35,22.71 27.06,24.42 27.19,24.42 L7.2
MOSI  (1 unrouted)
N$1
  Top 0.127: R1_USB.2 23.76,27.34 23.76,27.47 24.21,27.91 J4.A5
N$2
  Top 0.127: R2_USB.1 22.87,27.28 22.87,26.9 22.62,26.64 21.98,26.64 21.48,27.15 21.48,27.6 21.22,27.85 21.22,28.68 J4.B5
N$3  (via drill 0.3)
  Top 0.127: v32.84,16.99 32.78,17.05 32.78,17.44 U1.P$H23 | v34.37,16.99 C3.2 | v35.96,18.26 36.4,18.71 37.1,18.71 L1.1
  Route15 0.127: v34.37,16.99 v32.84,16.99
  Bottom 0.127: v35.96,18.26 34.68,16.99 v34.37,16.99
N$4  (via drill 0.3)
  Top 0.127: C4.2 38.49,17.56 38.49,17.94 38.18,18.26 38.18,18.64 L1.2 38.24,18.64 38.37,18.77 v39.07,18.77 39.38,18.77 39.45,18.71 39.64,18.71 C22.2 | v42.24,18.77 41.8,18.77 41.29,18.26 ANT1.1
  Route15 0.127: v42.24,18.77 v39.07,18.77
N$6  (via drill 0.3)
  Top 0.127: 15.09,24.33 14.43,23.66 Q3.3 | 15.09,24.33 15.13,24.36 15.13,25.95 14.87,26.2 14.36,26.2 C2-EP-DR.2 | v16.14,18.01 16.14,15.91 D5.2 | 15.09,24.33 v15.19,24.23 | v6.37,29 4.72,30.65 L5.1
  Route15 0.127: v16.14,18.01 16.14,19.53 15.63,20.04 15.63,23.79 v15.19,24.23 11.14,24.23 v6.37,29
N$8  (via drill 0.3)
  Top 0.127: v33.29,19.79 33.1,19.59 33.1,19.53 32.84,19.28 32.84,18.96 32.78,18.9 32.78,18.83 32.72,18.77 32.78,18.71 32.78,18.45 U1.P$D23 | v34.11,18.77 34.37,19.02 34.37,19.28 34.43,19.34 C11.2
  Route15 0.127: v33.29,19.79 33.29,19.59 v34.11,18.77
N$10
  Top 0.127: C1.1 32.91,22.96 33.73,22.96 34.05,22.64 X1.1 34.11,22.58 34.11,22.33 35.26,21.18 X1.3 35.19,21.12 35.19,20.74 34.91,20.45 | 34.91,20.45 34.68,20.23 34.37,20.23 33.35,19.21 U1.P$B24 | 34.91,20.45 35,20.36 35.19,20.36 35.64,19.91 36.15,19.91 C2.1
N$12
  Top 0.127: EPD_C6.2 12.4,15.78 12.01,15.78 11.38,15.15 11.38,14.77 11.25,14.64 11,14.64 10.87,14.51 10.68,14.51 10.62,14.58 J1.18
N$13
  Top 0.127: EPD_C7.2 12.4,14.51 11.57,14.51 11.13,14.07 10.62,14.07 J1.19
N$14
  Top 0.127: EPD_C8.2 12.4,13.24 11.51,13.24 11.13,13.62 10.62,13.62 J1.20
N$15  (via drill 0.3)
  Top 0.127: 15.76,22.71 15.76,22.52 15.82,22.45 D4.2 15.76,22.71 | 15.76,22.71 15.76,24.42 15.44,24.74 15.44,25.5 15.38,25.56 15.38,26.07 15.32,26.14 15.32,26.58 14.94,26.96 13.79,26.96 13.54,26.71 13.54,25.31 13.86,24.99 14.3,24.99 C2-EP-DR.1 | v17.22,20.55 17.54,20.23 17.54,19.4 D2.1 | 15.76,22.71 v15.06,22.71
  Bottom 0.127: v15.06,22.71 v17.22,20.55
N$17
  Top 0.127: U1.P$N24 33.35,16.17 33.86,16.17 34.18,15.85 34.49,15.85 C9.2
N$18
  Top 0.127: EPD_C2.2 13.09,21.44 11.32,21.44 11.13,21.63 10.62,21.63 J1.4
N$19
  Top 0.127: U1.P$B3 27.51,19.21 27.51,19.28 27.45,19.34 27.45,20.23 27.51,20.29 L2.1
N$20
  Top 0.127: EPD_C1.2 12.14,20.1 11.13,21.12 10.62,21.12 J1.5
N$22
  Top 0.127: R1_EP_DR.1 5.09,26.71 5.86,26.71 5.98,26.83 6.11,26.83 6.24,26.71 6.3,26.71 6.36,26.77 R_TYPE_SEL.2 6.43,26.77 6.55,26.77 6.62,26.83 7.76,26.83 8.33,26.26 SJ1.2
N$23
  Top 0.127: EPD_C10.2 12.27,10.64 12.27,11.02 12.01,11.28 11.82,11.28 11.32,11.78 11.32,12.42 11.13,12.61 10.62,12.61 J1.22
N$25
  Top 0.127: EPD_C12.2 10.74,10.77 10.74,11.15 10.68,11.21 10.68,11.53 10.62,11.59 J1.24
N$28  (via drill 0.3)
  Top 0.127: v17.86,26.64 17.86,26.9 17.67,27.09 17.48,27.09 17.41,27.02 IC1.D1 | v17.67,28.04 17.6,28.1 17.16,28.1 R9.2
  Bottom 0.127: v17.86,26.64 17.86,27.85 v17.67,28.04
N$29
  Top 0.127: IC9.D1 22.11,23.6 22.05,23.6 21.98,23.66 21.79,23.66 21.73,23.6 21.6,23.6 21.48,23.72 21.22,23.72 R4.2
N$30
  Top 0.127: IC9.E1 22.11,23.09 22.11,23.02 22.05,22.96 22.05,22.83 22.18,22.71 22.18,22.14 21.98,21.94 21.67,21.94 R2.2
N$31
  Top 0.127: R3.2 21.41,10.83 21.09,10.83 20.71,11.21 20.52,11.21 IC3.1
N$32
  Top 0.127: U1.P$C1 26.75,18.71 26.62,18.71 26.49,18.83 26.49,18.9 26.43,18.96 26.43,19.02 25.79,19.66 24.97,19.66 C5.1
N$33  (via drill 0.3)
  Top 0.127: v27,19.72 27.13,19.59 27.13,19.34 27.19,19.28 27.19,19.21 27.25,19.15 27.25,18.71 27.32,18.64 27.32,18.45 U1.P$D2 | v25.6,19.21 25.6,18.64 25.29,18.32 X2\.1 25.22,18.32 25.1,18.45 23.7,18.45 C17.2
  Route15 0.127: v27,19.72 26.11,19.72 v25.6,19.21
N$34
  Top 0.127: U1.P$AC5 28.02,13.75 27.89,13.75 27.76,13.62 27.7,13.62 27.64,13.69 27.57,13.62 27.13,13.62 26.56,13.05 25.86,13.05 25.73,12.93 C20.1
N$35  (via drill 0.3)
  Top 0.127: 24.08,16.86 23.64,16.42 23.64,16.1 23.57,16.04 C18.2 | 24.08,16.86 24.14,16.93 25.73,16.93 26.43,17.63 26.37,17.69 26.37,17.88 26.68,18.2 26.94,18.2 27,18.13 27.13,18.13 27.25,18.01 U1.P$F2 | v24.14,14.96 24.21,14.96 25.03,15.78 25.22,15.78 X2\.2 | 24.08,16.86 v23.95,16.99
  Bottom 0.127: v24.14,14.96 24.14,16.8 v23.95,16.99
N$39
  Top 0.127: IC2.A2 21.67,9.37 22.11,9.37 22.43,9.69 22.81,9.69 22.87,9.75 C32.2
N$40  (via drill 0.3)
  Top 0.127: v29.35,21.25 29.29,21.31 29.22,21.31 29.16,21.25 28.33,21.25 28.21,21.37 28.08,21.25 27.57,21.25 L2.2 | v26.75,22.39 27,22.64 27,23.09 L3.1
  Route15 0.127: v29.35,21.25 27.89,21.25 v26.75,22.39
N$41  (via drill 0.3)
  Top 0.127: C15.1 28.78,20.61 28.84,20.55 29.92,20.55 C16.2 29.98,20.61 30.11,20.61 v30.56,21.05 | 33.73,18.32 34.18,18.32 34.3,18.2 34.62,18.2 C10.2 | 33.73,18.32 33.42,18.32 33.35,18.26 U1.P$E24 | v27.89,19.66 27.83,19.59 27.95,19.47 27.95,19.34 28.02,19.28 28.02,19.21 U1.P$B5 | v28.71,23.34 28.59,23.21 28.14,23.21 28.08,23.15 L3.2 | 33.73,18.32 33.73,18.39 33.42,18.71 v33.22,18.71
  Bottom 0.127: v27.89,19.66 27.89,22.52 28.65,23.28 | 28.65,23.28 30.72,21.21 | 30.72,21.21 v33.22,18.71 | 28.65,23.28 v28.71,23.34 | 30.72,21.21 v30.56,21.05
N$52
  Top 0.127: U1.P$A18 31.25,19.72 31.25,19.91 31.06,20.1 31.06,20.48 31.13,20.55 C13.2
OUT+
  Top 0.127: IC2.A3 21.67,8.86 22.68,7.85 23,7.85 TP_OP.TP
OUT-
  Top 0.127: IC2.C3 20.59,8.86 20.33,8.61 20.33,8.54 20.52,8.36 20.52,7.21 TP_ON.TP
P0.13
  Top 0.127: U1.P$AD8 28.84,13.18 28.84,12.99 29.03,12.8 29.03,11.4 33.35,7.08 33.35,6.13 33.48,6 C30.2 33.35,6.07 33.22,5.94 32.78,5.94 | 32.78,5.94 32.27,5.94 R5.1 | 32.78,5.94 32.78,5.69 32.53,5.43 32.53,4.1 SW_UP.2
P0.14  (via drill 0.3)
  Top 0.127: 20.75,4.7 21.35,4.1 21.54,4.1 SW_ENT.2 | 20.75,4.7 20.65,4.8 20.27,4.8 R8.1 | v28.52,13.62 28.59,13.69 29.03,13.69 U1.P$AC9 | v22.81,6.39 22.56,6.13 22.56,5.75 C31.2 22.49,5.69 22.37,5.56 21.6,5.56 20.75,4.7
  Bottom 0.127: v28.52,13.62 28.52,12.1 v22.81,6.39
P1.01  (1 unrouted)
  Top 0.127: R_PWR_EPD.1 29.98,29.12 30.56,29.12 31.51,30.07 31.51,30.39 Q1.1
P1.02  (via drill 0.3)
  Top 0.127: v33.8,14.71 33.73,14.77 33.67,14.77 33.61,14.71 33.35,14.71 U1.P$W24 | v11.63,7.53 11.44,7.34 11.44,7.02 R7.1 11.51,6.96 11.51,6.77 11.19,6.45 11.19,5.81 C29.1 11.13,5.81 11.13,5.37 10.55,4.8 10.55,4.1 SW_DN.2
  Route15 0.127: v33.8,14.71 33.54,14.71 26.37,7.53 v11.63,7.53
P1.09  (via drill 0.3)
  Top 0.127: v26.24,14.9 26.43,15.09 26.37,15.15 26.37,15.4 26.62,15.66 26.75,15.66 U1.P$R1 | v35,16.42 34.94,16.48 34.75,16.48 34.68,16.42 33.8,16.42 33.54,16.67 33.35,16.67 U1.P$L24
  Route15 0.127: v26.24,14.9 26.43,14.9 28.27,13.05 29.22,13.05 30.18,14.01 32.27,14.01 34.68,16.42 v35,16.42
PREVGH
  Top 0.127: 12.11,12.45 12.01,12.55 11.7,12.55 11.13,13.12 10.62,13.12 J1.21 | 12.11,12.45 12.27,12.29 12.27,11.91 EPD_C9.2 | 12.11,12.45 12.21,12.55 12.78,12.55 12.84,12.61 13.03,12.42 13.79,12.42 13.86,12.36 D5.1
PREVGL
  Top 0.127: J1.23 10.55,12.1 9.98,12.1 9.86,11.97 9.86,9.31 10.3,8.86 11.25,8.86 11.63,9.24 12.27,9.24 EPD_C11.2 12.33,9.18 12.4,9.12 12.4,8.74 12.71,8.42 13.86,8.42 17.54,12.1 D2.2
RESE
  Top 0.127: R1_EP_DR.2 5.09,26.14 5.22,26.14 5.28,26.07 5.54,26.07 6.68,24.93 8.21,24.93 9.86,23.28 9.86,22.26 9.98,22.14 10.55,22.14 J1.3 10.62,22.07 11.44,22.07 12.27,22.9 12.27,23.02 Q3.2
RESET  (via drill 0.3)  (1 unrouted)
  Top 0.127: v42.11,8.99 42.56,9.44 42.69,9.44 J2.6 | v30.37,9.44 28.97,9.44 TP_RESET1.TP
  Route15 0.127: v42.11,8.99 40.91,8.99 40.27,9.62 30.56,9.62 v30.37,9.44
SCK  (via drill 0.3)
  Top 0.127: v30.49,20.17 30.43,20.17 30.37,20.1 30.3,20.17 30.11,20.17 29.79,19.85 29.79,19.72 U1.P$A12 | v12.59,18.45 11.25,17.12 10.62,17.12 J1.13
  Bottom 0.127: v30.49,20.17 29.35,19.02 27.95,19.02 24.59,15.66 24.59,14.77 24.33,14.51 23.57,14.51 20.71,17.37 20.71,17.94 20.21,18.45 v12.59,18.45
SCL  (via drill 0.3)  (1 unrouted)
  Top 0.127: IC2.C1 20.59,9.94 20.52,9.94 20.21,10.26 20.21,10.51 19.95,10.77 19.95,11.15 IC3.12 19.95,11.21 19.95,11.47 19.89,11.53 v19.89,12.16 | R17.2 20.84,14.71 21.22,14.71 21.67,15.15 21.67,16.36 21.29,16.74 TP_SCL1.TP 21.22,16.8 v20.27,17.75 | 18.14,25.72 18.17,25.69 19.06,25.69 19.32,25.44 19.32,24.99 19.25,24.93 19.25,24.36 19.7,23.91 20.4,23.91 20.71,24.23 20.84,24.23 20.9,24.29 21.16,24.29 R4.1 | 18.14,25.72 17.6,26.26 17.41,26.26 IC1.B1 | v9.73,31.15 9.92,31.34 10.43,31.34 U3.7 | 18.14,25.72 v18.43,26.01
  Route15 0.127: v20.27,17.75 20.27,19.09 18.3,21.05 18.3,25.88 v18.43,26.01
  Bottom 0.127: v19.89,12.16 19.89,17.37 v20.27,17.75 | v9.73,31.15 12.71,31.15 17.86,26.01 v18.43,26.01
SDA  (via drill 0.3)  (2 unrouted)
  Top 0.127: 21.57,13.09 21.48,12.99 21.48,12.16 21.03,11.72 20.52,11.72 IC3.2 | 21.57,13.09 23.6,15.12 | 23.6,15.12 24.08,15.59 24.08,15.85 24.02,15.91 24.02,16.42 24.27,16.67 25.86,16.67 25.92,16.74 26.75,16.74 U1.P$L1 | 21.57,13.09 20.9,13.75 20.27,13.75 19.06,14.96 19.06,15.28 R18.2 | v21.6,22.96 21.67,22.9 21.67,22.52 R2.1 | 23.6,15.12 v23.32,15.4 | v12.97,30.26 10.87,30.26 10.49,30.64 10.49,30.83 U3.8 | v29.86,25.82 31.76,25.82 TP_SDA1.TP
  Bottom 0.127: 23.22,19.5 23.32,19.4 v23.32,15.4 | 23.22,19.5 21.6,21.12 v21.6,22.96 20.52,22.96 13.22,30.26 v12.97,30.26 | v29.86,25.82 26.87,22.83 26.56,22.83 23.22,19.5
SWDCLK
  Top 0.127: U1.P$AA24 33.35,14.2 33.61,14.2 33.67,14.26 34.05,14.26 34.56,14.77 37.03,14.77 TP_SWDCLK1.TP 37.1,14.71 37.48,14.32 38.3,14.32 40.53,12.1 40.53,11.78 40.46,11.72 40.46,11.02 40.53,10.96 40.53,10.39 41.42,9.5 J2.4
SWDIO
  Top 0.127: U1.P$AC24 33.35,13.69 33.8,13.24 34.88,13.24 TP_SWDIO1.TP 34.88,13.18 35.83,12.23 35.83,12.1 38.24,9.69 38.62,9.69 38.69,9.75 39.07,9.75 39.13,9.69 39.45,9.69 39.64,9.88 39.77,9.88 40.15,9.5 J2.2
SWO
  Top 0.127: U1.P$AD22 32.34,13.18 32.34,12.99 32.72,12.61 32.72,12.04 33.29,11.47 33.29,10.89 TP_SWO1.TP
VBAT  (1 unrouted)
  Top 0.3: U3.2 12.46,31.41 12.46,31.85 U3.3 12.59,31.91 13.03,31.91 13.6,31.34 13.6,30.64 C27.2 13.67,30.52 14.17,30.52 14.68,30.01 14.68,29.37 15.03,29.02 | 15.03,29.02 15.76,29.75 16.14,29.75 TP_VBAT.TP | 15.03,29.02 14.75,28.74 14.75,28.23 C37.1
VBUS  (via drill 0.3)
  Top 0.3: C42.1 25.35,27.85 25.29,27.91 25.29,28.61 J4.A4_B9 25.29,28.8 25.16,28.93 25.16,29.12 25.29,29.25 24.84,29.69 24.4,29.69 | 24.4,29.69 23.95,29.69 23.45,30.2 23.45,31.34 23.7,31.6 24.46,31.6 D3.5 | 27.06,12.86 27.06,12.99 27.25,13.18 U1.P$AD2 | 27.06,12.86 27.32,12.61 27.32,12.1 C21.1 | IC1.A2 16.9,25.75 16.84,25.69 16.84,25.31 17.29,24.87 C38.1 17.41,24.87 18.49,24.87 v18.87,25.25 | J4.A9_B4 20.59,28.68 20.59,27.85 20.78,27.66 20.78,27.15 C43.1 20.71,27.02 20.71,26.96 20.78,26.9 20.78,26.64 v21.03,26.39 | v25.16,12.1 26.11,12.1 26.81,12.8 26.94,12.8 27.06,12.86 | v24.4,29.63 24.4,29.69
  Route15 0.3: v25.16,12.1 25.16,12.16 20.21,17.12 19.95,17.12 17.86,19.21 17.86,25.63 17.22,26.26 17.22,26.96 17.54,27.28 18.17,27.28 19.06,26.39 19.06,25.44 v18.87,25.25
  Bottom 0.3: v18.87,25.25 19.89,25.25 v21.03,26.39 21.16,26.39 v24.4,29.63
VREG  (1 unrouted)
  Top 0.3: 21.7,25.21 21.6,25.31 21.6,25.75 C24.2 21.73,25.82 22.68,25.82 C23.2 | 21.7,25.21 22.11,24.8 IC9.A1 22.24,24.74 22.49,24.74 IC9.A2 22.68,24.74 22.94,24.74 | 22.94,24.74 IC9.A3 | 21.7,25.21 21.35,24.87 20.71,24.87 20.4,25.18 20.08,25.18 17.73,27.53 17.35,27.53 17.29,27.6 17.22,27.6 17.16,27.53 17.09,27.53 16.97,27.41 16.78,27.41 16.71,27.34 16.4,27.34 15.95,26.9 15.95,26.26 C39.1 | TP_VREG.TP 24.59,24.1 24.21,24.1 23.38,24.93 23.19,24.93 23.06,24.8 22.94,24.74
(copper drawn outside any net)
  shapes: Bottom area x2, Route2 area x2, Top area x2